# Altium PCB UKU207XX_POWER_BOARD.PCBDOC
Units mm, origin at the board's own origin, x right, y up, seen from the top; angles counter-clockwise.
Board outline 334.15 x 155.4 mm, 2 copper layers (Top Layer, Bottom Layer); 96 components, 597 nets, 270 pads, 39 vias.
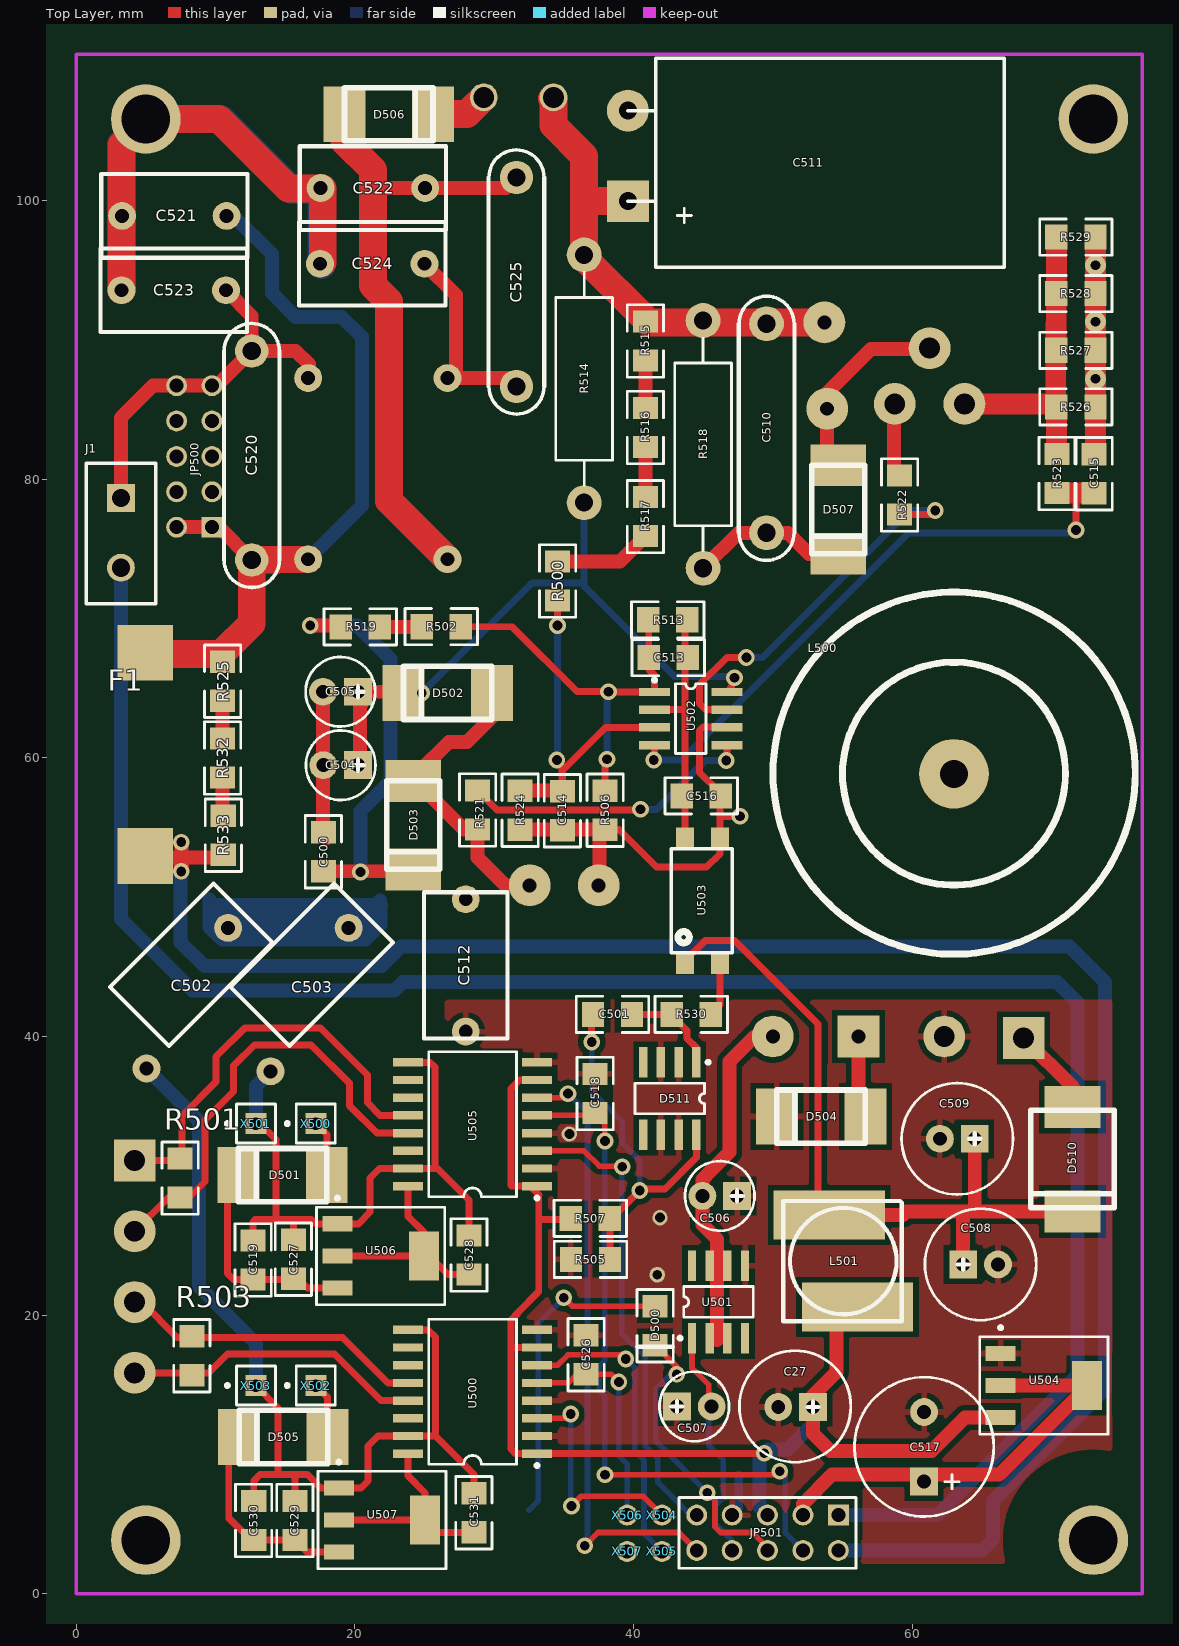
[diagram p0: Top Layer view]
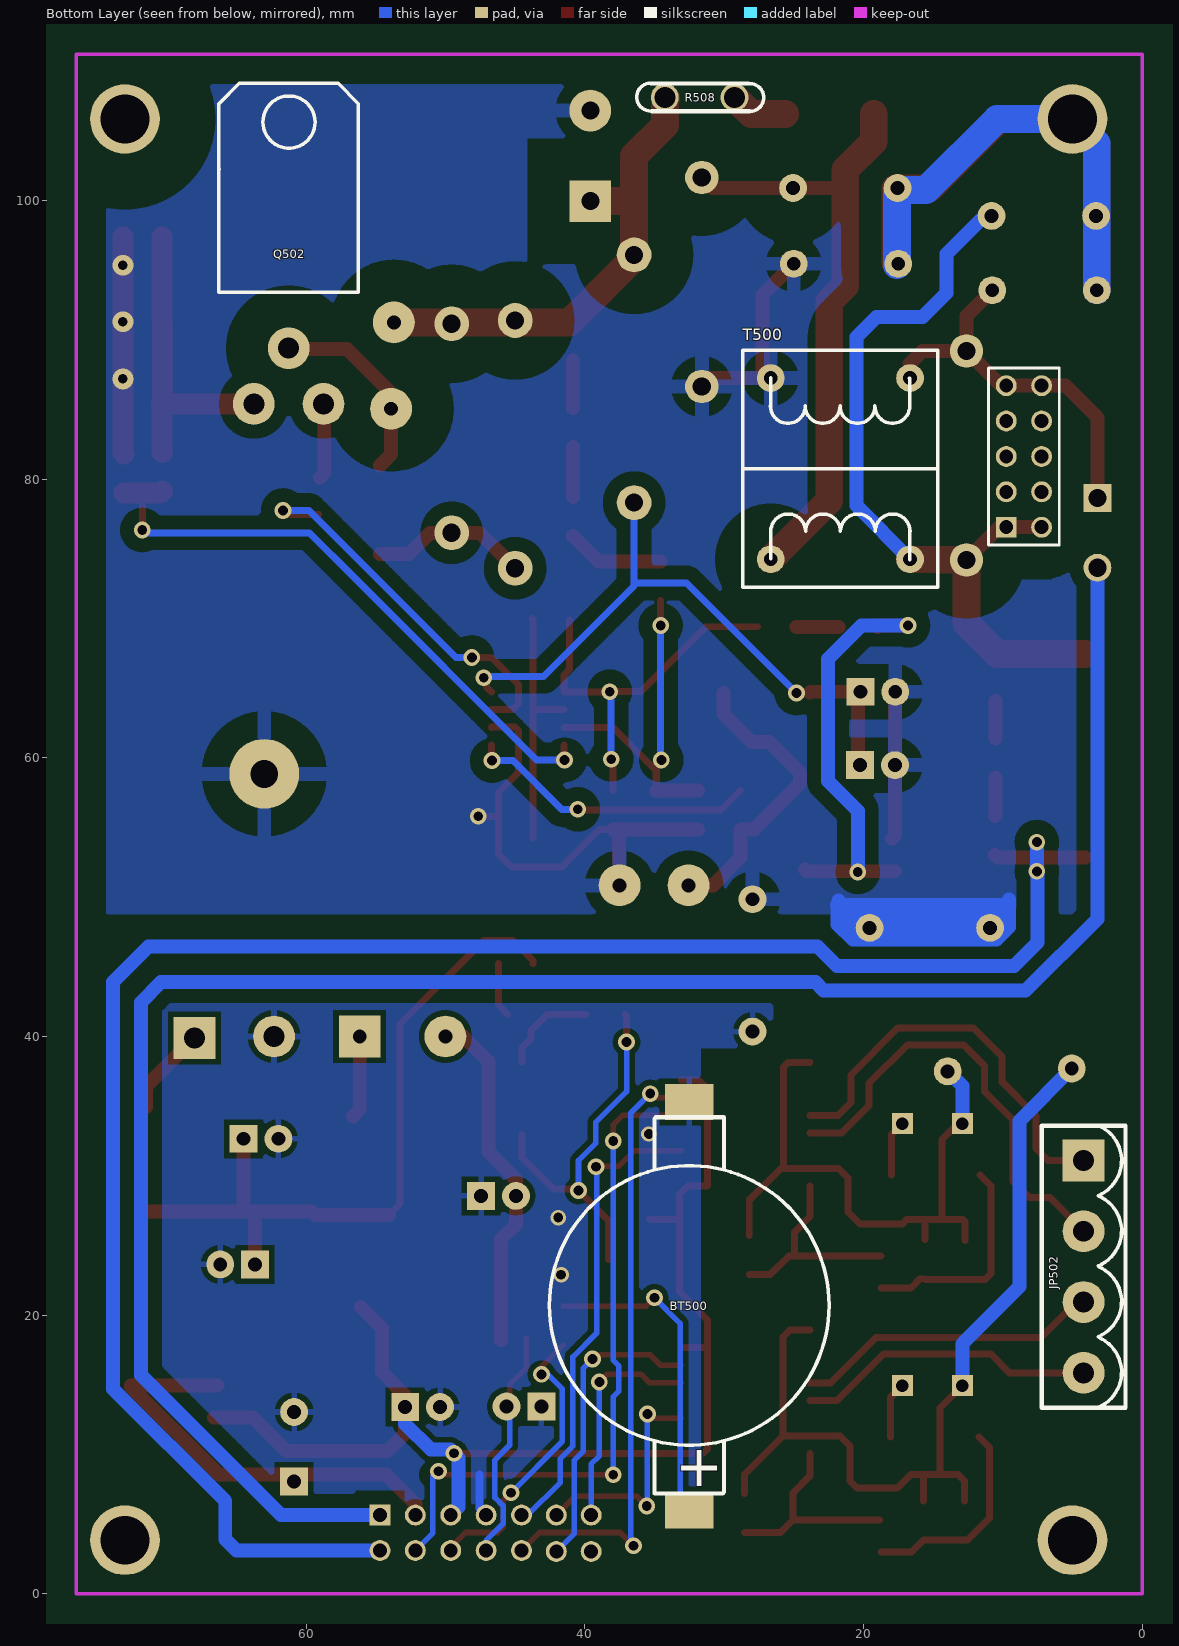
[diagram p1: Bottom Layer view, seen from below]

## Layer stack, top to bottom
Top Layer: signal copper 0.0356
Dielectric: dielectric 0.32, FR-4, Dk 4.8
Bottom Layer: signal copper 0.0356

## Board outline
-195.203,123.2 -195.203,-32.2 138.947,-32.2 138.947,123.2

## Design rules (kind name [scope] priority, off if disabled: settings)
Clearance Clearance_1 [InNet(NetJ1_2) or InNet(NetF1_1) vs InPoly] p1: gap=1
Clearance Keep_Out [OnLayer('Keep-Out Layer') vs not OnLayer('Top Overlay')] p2: gap=2
Clearance Clearance_2 [InNet('NetD506_1') or
InNet('NetD505_2') or
InNet('NetC510_2') or
InNet('NetD505_1') or
InNet('NetD507_1') or
InNet('NetC520_2') or
InNet('NetC522_2') or
InNet('GND_GND') vs InPoly] p3: gap=3
Clearance Clearance_4 [InNet(NetC500_1) or
InNet(NetBT500_2) vs HasPad('Free-0')] p4: gap=4
Clearance Holes [InPoly vs HasPad('Free-0') Or HasPad('Free-1') Or HasPad('Free-2') Or HasPad('Free-3')] p5: gap=2
Clearance Clearance_3 [InPoly and InNet(NetC500_1)] p6: gap=1
Clearance Poly [InPoly] p7: gap=0.4
Clearance [All] p8: gap=0.18
ComponentClearance [All] p1: gap=0.254 collisioncheckmode=0
HoleSize [All] p1: absolutevalues=TRUE maxlimit=5 minlimit=0 maxpercent=80.000 minpercent=20.000
PolygonConnect PolygonConnect_2 [InNet('NetC500_1')] p1: connectstyle=Relief reliefconductorwidth=1 reliefentries=4 polygonreliefangle="90 Angle"
PolygonConnect PolygonConnect_1 [InNet(NetC100_2)] p2: connectstyle=Direct reliefconductorwidth=0.254 reliefentries=4 polygonreliefangle="90 Angle"
PolygonConnect [All] p3: connectstyle=Relief reliefconductorwidth=0.4 reliefentries=4 polygonreliefangle="90 Angle"
RoomDefinition UKU207xx_power_board [InComponentClass('UKU207xx_power_board')] p1: confinementstyle=ConfineIn formatcopy=TRUE outline -224.903,-32.75 -174.103,-32.75 -174.103,-7.35 -224.903,-7.35
RoutingLayers [All] p1: top layer=Horizontal bottom layer=Vertical
RoutingVias [All] p1: holewidth=0.7 width=1.2 viastyle="Through Hole" minholewidth=0.6 minwidth=1.1 maxholewidth=0.7 maxwidth=1.2
SolderMaskExpansion [All] p1: expansion=0.102
TestPointUsage [All] p1: valid=0 allowmultiple=FALSE
Testpoint [All] p1: side=15 testpointundercomponent=TRUE minsize=1.016 maxsize=2.54 preferedsize=1.524 minholesize=0 maxholesize=1.016 preferedholesize=0.813 testpointgrid=0.025 style=1023 order=-539222988
Width [All] p1: maxlimit=5 minlimit=0.2 preferedwidth=0.254 toplayer_prefwidth=0.5 bottomlayer_prefwidth=1 minimp=50.000000 maximp=50.000000 favimp=50.000000
15 further rules are at their usual default settings.

## Components (designator, comment, footprint, x,y, rotation, side; value= is the part's Value field where it differs from the comment)
BT500 "CR2032" BAT_HOLD_SMD 32.5,6 r90 bottom
C27 "nichicon 330x16" el3 52.897,13.4 r180 top (schematic designator C?)
C500 "1.0" _1206#1 17.75,53.25 r270 top
C501 "0.1" _1206#1 38.5,41.6 r0 top
C502 "2n2" C8#1 5.6,42.5 r45 top (schematic designator C?)
C503 "2n2" C8#2 14.25,42.5 r45 top (schematic designator C?)
C504 "LXZ 22.0x50" el3 20.246,59.463 r180 top
C505 "LXZ 22.0x50" el3 20.227,64.731 r180 top
C506 "LXZ 22.0x50" el3 47.45,28.55 r180 top
C507 "LXZ 22.0x50" el3 43.1,13.45 r0 top
C508 "nichicon 330x16" el3 63.65,23.65 r0 top
C509 "nichicon 330x16" el3 64.5,32.65 r180 top
C510 "0.1x630" c15#1 49.55,83.65 r90 top
C511 "10.0x450" el_15_25_h 39.6,102.7 r270 top
C512 "1.0" C8#3 27.95,41.35 r90 top
C513 "390" _1206#1 42.5,67.2 r0 top
C514 "1n0" _1206#1 34.9,56.2 r270 top
C515 "1n0" _1206#1 73.05,80.4 r90 top
C516 "3n3" _1206#1 44.854,57.265 r180 top
C517 "1000x6,3 JAM" el5 60.85,13.05 r270 top
C518 "1n0" _1206#2 37.25,35.9 r270 top
C519 "1.0" _1206#2 12.7,23.95 r270 top
C520 "0.1x630" c15#2 12.6,81.7 r270 top
C521 "2n2" C8#4 3.3,98.9 r0 top
C522 "2n2" c8 17.55,100.9 r0 top
C523 "2n2" c8 10.75,93.55 r180 top
C524 "2n2" c8 25,95.45 r180 top
C525 "0.1х630" c15#2 31.6,94.15 r90 top
C526 "1n0" _1206#2 36.6,17.15 r270 top (schematic designator C1)
C527 "1.0" _1206#2 15.6,24 r270 top
C528 "1.0" _1206#2 28.2,24.3 r270 top
C529 "1.0" _1206#2 15.7,5.25 r270 top
C530 "1.0" _1206#2 12.75,5.25 r270 top
C531 "1.0" _1206#2 28.55,5.8 r270 top
D500 "LL4148" _1206d 41.55,19.25 r90 top
D501 "MBRS1100T3G" D_6_3 11.65,30.05 r0 top
D502 "MBRS1100T3G" D_6_3 23.5,64.65 r0 top
D503 "MBRS1100T3G" D_6_3 24.2,52 r90 top
D504 "MBRS1100T3G" D_6_3 50.3,34.25 r0 top
D505 "MBRS1100T3G" D_6_3 11.7,11.25 r0 top
D506 "STTH112" D_6_3 25.6,106.2 r180 top
D507 "STTH112" D_6_3 54.7,74.65 r90 top
D510 "30BQ100" 30BQ100 71.5,31.2 r90 top
D511 "TL431ACD" SO-G8 42.6,35.55 r180 top
F1 "Fuse 1" PIN-W2/E2.8 3.5,57.25 r90 top (schematic designator F?)
J1 "" BT5-2 3.2,78.65 r270 top
JP500 "IDC-10" HDR2X5 9.75,76.55 r90 top
JP501 "PLHD-10" HDR2X5 54.697,5.65 r180 top
JP502 "Header 4" 2EDG-5.08-4 4.2,31.1 r270 bottom
L500 "L220-K10" trans_ring1 63,58.85 r0 top
L501 "SDR0805-390KL" L10x10 60.15,28.95 r180 top
Q502 "STP4NK80Z" TO220_h 61.25,100.9 r0 bottom
R500 "M10" _1206#2 34.55,72.7 r90 top (schematic designator R?)
R501 "1K0" _1206#2 7.45,29.85 r90 top
R502 "6K2" _1206#1 26.2,69.4 r180 top
R503 "1K0" _1206#2 8.3,17.1 r90 top
R505 "2K2" _1206#1 36.9,24 r180 top
R506 "2K2" _1206#1 37.95,56.25 r90 top
R507 "2K2" _1206#1 36.9,26.95 r0 top
R508 "NTC 50R 10" JVR07N 34.25,107.4 r180 bottom
R513 "M10" _1206#1 42.45,69.9 r180 top
R514 "M24" AXIAL-0.7 36.45,87.2 r90 top
R515 "M10" _1206#1 40.847,89.923 r90 top
R516 "M10" _1206#1 40.847,83.72 r90 top
R517 "M10" _1206#1 40.847,77.32 r90 top
R518 "39K" AXIAL-0.7 45,82.5 r270 top
R519 "5K1" _1206#1 20.4,69.4 r0 top
R521 "51K" _1206#1 28.8,56.265 r90 top
R522 "30" _1206#1 59.1,78.85 r270 top
R523 "K56" _1206#1 70.402,80.4 r270 top
R524 "2K2" _1206#1 31.85,56.25 r90 top
R525 "33K" _1206#2 10.5,65.5 r90 top
R526 "6R8" _1206#1 71.758,85.192 r0 top
R527 "6R8" _1206#1 71.758,89.256 r0 top
R528 "6R8" _1206#1 71.758,93.32 r0 top
R529 "6R8" _1206#1 71.758,97.383 r0 top
R530 "K18" _1206#1 44.15,41.6 r0 top
R532 "33K" _1206#2 10.5,60 r90 top
R533 "33K" _1206#2 10.55,54.45 r90 top
T500 "TRANS1_1" 3030R4 21.65,80.75 r0 bottom
U500 "ADM2483" SO-G16/D10.4 28.45,14.5 r90 top
U501 "L79L05ACD" SO-G8 46.1,20.95 r0 top
U502 "L6565" so-g8 44.104,62.816 r270 top
U503 "FOD817ASD" FOD817ASD 43.7,45.25 r0 top
U504 "REG1117-3.3" DSO-G3 69.45,14.95 r270 top
U505 "ADM2483" SO-G16/D10.4 28.45,33.7 r90 top
U506 "REG1117-5.0" DSO-G3 21.85,24.25 r270 top
U507 "REG1117-5.0" DSO-G3 21.95,5.3 r270 top
X500 "Socket" PIN1#1 17.2,33.75 r90 top
X501 "Socket" PIN1#1 12.9,33.75 r90 top
X502 "Socket" PIN1#1 17.2,14.95 r90 top
X503 "Socket" PIN1#1 12.9,14.95 r90 top
X504 "Socket" PIN1#2 39.75,5.4 r90 top
X505 "Socket" PIN1#3 39.35,2.8 r90 top
X506 "Socket" PIN1#4 38.3,5.65 r90 top
X507 "Socket" PIN1#5 38.3,1.9 r90 top

## Footprints (in the part's own frame and the unit in brackets; to place one, negate y for a bottom-side part, rotate by r counter-clockwise, add the part's x,y. Pads: shape width x height; smd on the part's side, far side on the other; paste and mask are expansions set on the pad)
2EDG-5.08-4 [mm]
  rect 3x3 hole 1.5: 1(0,0)
  round 3 hole 1.5: 2(5.08,0) 3(10.16,0) 4(15.24,0)
  silkscreen extent -2.5,-3 17.75,3
30BQ100 [mm]
  rect 3x4 smd: 1(3.75,0) 2(-3.75,0)
  silkscreen extent -3.5,-3 3.5,3
3030R4 [mm]
  round 2 hole 1: 1(-5,-6.5) 2(5,-6.5) 3(-5,6.5) 4(5,6.5)
  silkscreen extent -7,-8.5 7,8.5
_1206#1 [mm]
  rect 1.6x1.8 smd: 1(-1.408,-0.007) 2(1.392,-0.007)
  silkscreen extent -2.61,-1.31 2.59,1.29
_1206#2 [mm]
  rect 1.6x1.8 smd: 1(-1.412,-0.007) 2(1.388,-0.007)
  silkscreen extent -2.61,-1.31 2.59,1.29
_1206d [mm]
  rect 1.6x1.8 smd: 1(1.397,-0.001) 2(-1.403,-0.001)
  silkscreen extent -2.6,-1.3 2.6,1.3
AXIAL-0.7 [mm]
  round 2.5 hole 1.3: 1(-8.887,-0.008) 2(8.893,-0.008)
  silkscreen extent -7.62,-2.04 7.62,2.02
BAT_HOLD_SMD [mm]
  rect 2.6x3.5 smd: 1(0,0) 2(29.3,0)
  silkscreen extent 1.2,-10.03 28.2,10.03
BT5-2 [mm]
  rect 2x2 hole 1.3: 1(0.006,0.008)
  round 2 hole 1.3: 2(5.006,0.008)
  silkscreen extent -2.49,-2.49 7.61,2.51
C8#1 [mm]
  round 2 hole 1: 1(-3.783,-3.005) 2(7.498,-0.008)
  silkscreen extent -1.5,-3.01 9,2.99
C8#2 [mm]
  round 2 hole 1: 1(-3.748,-3.323) 2(7.498,-0.008)
  silkscreen extent -1.5,-3.01 9,2.99
C8#3 [mm]
  round 2 hole 1: 1(-1.002,-0.008) 2(8.498,-0.008)
  silkscreen extent -1.5,-3.01 9,2.99
C8#4 [mm]
  round 2 hole 1: 1(-0.002,-0.008) 2(7.498,-0.008)
  silkscreen extent -1.5,-3.01 9,2.99
c8 [mm]
  round 2 hole 1: 1(-0.002,-0.008) 2(7.498,-0.008)
  silkscreen extent -1.5,-3.01 9,2.99
c15#1 [mm]
  round 2.5 hole 1.3: 1(-7.5,0) 2(7.5,0)
  silkscreen extent -9.48,-2 9.48,2
c15#2 [mm]
  round 2.4 hole 1.3: 1(-7.5,0) 2(7.5,0)
  silkscreen extent -9.48,-2 9.48,2
D_6_3 [mm]
  rect 3x4 smd: 1(6.341,0.006) 2(-0.009,0.006)
  silkscreen extent -0.01,-1.9 6.34,1.91
DSO-G3 [mm]
  rect 1.1x2.15 smd: 1(-2.3,-3.1) 2(0,-3.1) 3(2.3,-3.1)
  rect 3.5x2.15 smd: 4(0,3.1)
  silkscreen extent -4.27,-4.6 3.5,4.6
el3 [mm]
  rect 2x2 hole 1: 1(0.011,-0.008)
  round 2 hole 1: 2(2.511,-0.008)
  silkscreen extent -2.7,-4.05 5.3,3.95
el5 [mm]
  rect 2x2 hole 1: 1(5.001,0.007)
  round 2 hole 1: 2(0.001,0.007)
  silkscreen extent -2.5,-4.99 7.5,5.01
el_15_25_h [mm]
  rect 3x3 hole 1.3: 1(2.75,0)
  round 3 hole 1.3: 2(-3.75,0)
  silkscreen extent -7.5,0 7.5,27
FOD817ASD [mm]
  rect 1.3x1.5 smd: 1(0,0) 2(2.5,0) 3(2.5,9) 4(0,9)
  silkscreen extent -0.97,0.75 3.4,8.22
HDR2X5 [mm]
  rect 1.5x1.5 hole 1: 1(0,0)
  round 1.5 hole 1: 2(0,2.54) 3(2.54,0) 4(2.54,2.54) 5(5.08,0) 6(5.08,2.54) 7(7.62,0) 8(7.62,2.54) 9(10.16,0) 10(10.16,2.54)
JVR07N [mm]
  round 2 hole 1.5: 1(-0.004,0.002) 2(4.996,0.002)
  silkscreen extent -2.02,-1.01 7.09,1.02
L10x10 [mm]
  rect 8x3.5 smd: 1(4.075,8.372) 2(6.107,1.768)
  silkscreen extent 0.9,0.75 9.41,9.39
PIN1#1 [mm]
  rect 1.5x1.5 hole 0.9: 1(0,0)
  silkscreen extent -1.4,-1.4 1.4,2.17
PIN1#2 [mm]
  round 1.5 hole 1: 1(0.25,-2.29)
PIN1#3 [mm]
  round 1.5 hole 1: 1(0.24,-2.69)
PIN1#4 [mm]
  round 1.5 hole 1: 1(0,-1.24)
PIN1#5 [mm]
  round 1.5 hole 1: 1(1.14,-1.24)
PIN-W2/E2.8 [mm]
  rect 4x4 smd: 1(-4.3,-1.45) 2(10.3,-1.45)
SO-G8 [mm]
  rect 0.6x2.2 smd: 1(-1.905,-2.6) 2(-0.635,-2.6) 3(0.635,-2.6) 4(1.905,-2.6) 5(1.905,2.6) 6(0.635,2.6) 7(-0.635,2.6) 8(-1.905,2.6)
  silkscreen extent -2.88,-2.72 2.5,1.1
so-g8 [mm]
  rect 0.6x2.2 smd: 1(-1.905,-2.6) 2(-0.635,-2.6) 3(0.635,-2.6) 4(1.905,-2.6) 5(1.905,2.6) 6(0.635,2.6) 7(-0.635,2.6) 8(-1.905,2.6)
  silkscreen extent -2.88,-2.72 2.5,1.1
SO-G16/D10.4 [mm]
  rect 0.6x2.15 smd: 1(-4.445,-4.625) 2(-3.175,-4.625) 3(-1.905,-4.625) 4(-0.635,-4.625) 5(0.635,-4.625) 6(1.905,-4.625) 7(3.175,-4.625) 8(4.445,-4.625) 9(4.445,4.625) 10(3.175,4.625) 11(1.905,4.625) 12(0.635,4.625) 13(-0.635,4.625) 14(-1.905,4.625) 15(-3.175,4.625) 16(-4.445,4.625)
  silkscreen extent -5.42,-4.75 5.2,3.15
TO220_h [mm]
  round 3 hole 1.5: 1(-2.5,15.5) 2(0,11.5) 3(2.5,15.5)
  silkscreen extent -5,-7.5 5,7.5
trans_ring1 [mm]
  round 3 hole 1: 1(-9.3,32.4) 2(-9.1,26.2) 3(-25.5,-8) 4(-30.45,-8) 5(-13,-18.85)
  rect 3x3 hole 1: 6(-6.85,-18.85)
  round 3 hole 1.5 unplated: 7(-0.7,-18.85)
  rect 3x3 hole 1.5: 8(5,-18.95)
  silkscreen extent -12.99,-12.95 13.01,13.05

## Part data
BT500: library part Battery, "Multicell Battery"
C27 C504 C505 C506 C507 C508 C509 C511 C517: library part "Cap Pol1", "Polarized Capacitor (Radial)"
C500 C501 C502 C503 C510 C512 C513 C514 C515 C516 C518 C519 C520 C521 C522 C523 C524 C525 C526 C527 C528 C529 C530 C531: library part "Cap Semi", "Capacitor (Semiconductor SIM Model)"
D500: library part Diode, "Default Diode"
D501 D502 D503 D504 D505 D510: library part 10BQ015, "Schottky Rectifier"
D506 D507: library part 10BQ015, "Schottky Diode"
D511: "Programmable Precision Reference"
F1: "Fuse"
J1: library part JMP, "Switch"
JP500 JP501: library part "Header 10", "Header, 10-Pin"
JP502: library part "Header 3", "Header, 3-Pin"
L500: library part L1_dc_2, "Дроссель"
L501: library part "Inductor Konstr 2", "Magnetic-Core Inductor"
Q502: library part NMOS-2, "N-Channel Power MOSFET"
R500 R501 R502 R503 R505 R506 R507 R513 R514 R515 R516 R517 R518 R519 R521 R522 R523 R524 R525 R526 R527 R528 R529 R530 R532 R533: library part Res2, "Resistor"
R508: library part "Res Varistor", "Varistor (Voltage-Sensitive Resistor)"
U501: "Negative Voltage Regulator"
U503: library part F00817ASD
U504: "800mA and 1A Low Dropout Positive Regulator 2.85V, 3.3V, 5V, and Adjustable"
U506 U507: library part REG1117-3.3, "800mA and 1A Low Dropout Positive Regulator 2.85V, 3.3V, 5V, and Adjustable"

## Free pads (board coordinates)
  round 5 hole 3.5: 0(5,105.85) 0(5,3.85) 0(73,105.85) 0(73,3.85)
  round 5 hole 2: 1(63,58.85)

## Via types
v1: diameter 1.2, hole 0.7, Top Layer to Bottom Layer, 33 vias
v2: diameter 1.1, hole 0.7, Top Layer to Bottom Layer, 3 vias
v3: diameter 1.5, hole 0.7, Top Layer to Bottom Layer, 3 vias

## Nets (pads, with @x,y where several pads share a name; then routed paths per layer and width w, separated by ;. In a path a pad name is that pad's centre, name@x,y a point inside that pad or via, vN(x,y) a via of type N, cw(c..) or ccw(c..) an arc to the next point about the centre after c; other vN are vias at no path point)
+1.8V: 
+3.3V: 
+3V3: 
+5V: 
+5V_IZ: 
+IAKB1: 
+IAKB2: 
-5V: 
-5V_IZ: 
-IAKB1: 
-IAKB2: 
-UOUT: 
BAT: 
CANH: 
CANL: 
DB0: 
DB1: 
DB2: 
DB3: 
DB4: 
DB5: 
DB6: 
DB7: 
DT1: 
DT2: 
DT3: 
DT4: 
DT5: 
GND: 
GND_GND: C521.1 C522.1 C523.2 C524.2 pad.0@5,105.85 | length 66.4
  Top Layer w2: C523.2 3.252,104.002 pad.0@5.1,105.85 ; pad.0@5,105.85 10.25,105.85 15.25,100.85 17.7,100.85 C524.2@17.7,95.55
  Bottom Layer w2: C523.2 3.252,104.102 pad.0@5,105.85 ; pad.0@4.9,105.75 pad.0@5,105.85 ; C524.2@17.6,95.35 17.6,100.75 15.5,100.75 10.4,105.85 9.5,105.85 pad.0@5,105.85
NetA1_1: 
NetA1_2: 
NetBT1_1: 
NetBT1_2: 
NetBT2_1: 
NetBT2_2: 
NetBT500_1: BT500.1 D500.1 | length 23.1
  Top Layer w0.4: v1(35,21.25) 35.603,20.647 D500.1
  Bottom Layer w0.4: BT500.1 33.15,6.65 33.15,19.4 v1(35,21.25)
NetBT500_2: BT500.2 C27.2 C506.1 C507.1 C508.2 C509.2 C512.1 C517.2 C518.1 C526.1 D504.2 D511.2 D511.3 D511.6 D511.7 JP501.7 L500.7 R505.2 U500.2 U500.4 U500.8 U501.5 U504.1 U505.2 U505.4 U505.8 | length 3.1
  Bottom Layer w0.6: JP501.7 47.55,6.123 47.55,8.55
  other v2: 41.697,22.9 41.897,27 35.397,33
NetC2_1: 
NetC2_2: 
NetC11_1: 
NetC11_2: 
NetC12_2: 
NetC14_2: 
NetC21_1: 
NetC22_1: 
NetC23_1: 
NetC27_1: C27.1 JP501.5 L501.1 R507.1 U500.1 U500.7 U504.3 U505.1 U505.7 | length 89.1
  Top Layer w0.5: 31.3,17.75 31.35,17.75 31.425,17.675 U500.7 ; 31.7,20.2 33.2,21.7 33.2,28.6 ; 31.725,20.175 31.2,19.65 31.2,10.4 31.545,10.055 49.305,10.055 v1@49.35,10.1 ; U505.7 31.825,36.875 31.2,36.25 31.2,29.3 31.245,29.255 32.6,29.255 32.837,29.018 33.228,28.628 ; 33.2,26.85 35.3,26.85 R507.1@35.35,26.9
  Top Layer w1: L501.1 54.561,19.065 54.561,15.911 52.885,14.235 52.885,11.511 54.147,10.25 61.4,10.25 63.8,12.65 U504.3@66.6,12.65
  Bottom Layer w1: v1@49.35,10.1 49.364,10.1 v1(49.382,10.082) ; JP501.5 49.05,6.217 49.05,9.75 49.375,10.075 v1(49.382,10.082) ; C27.1 52.885,12.185 51.05,10.35 v1@49.65,10.35 ; v1(49.382,10.082) v1@49.65,10.35 ; v1(49.382,10.082) v1@49.65,10.35
NetC33_1: 
NetC35_2: 
NetC36_2: 
NetC37_2: 
NetC45_1: 
NetC45_2: 
NetC46_1: 
NetC46_2: 
NetC47_2: 
NetC48_1: 
NetC48_2: 
NetC49_1: 
NetC50_2: 
NetC51_2: 
NetC52_2: 
NetC53_2: 
NetC61_1: 
NetC61_2: 
NetC62_2: 
NetC63_2: 
NetC66_1: 
NetC100_1: 
NetC100_2: 
NetC101_1: 
NetC102_1: 
NetC103_1: 
NetC103_2: 
NetC104_2: 
NetC105_2: 
NetC107_1: 
NetC107_2: 
NetC110_1: 
NetC111_1: 
NetC111_2: 
NetC114_1: 
NetC117_1: 
NetC300_2: 
NetC302_1: 
NetC302_2: 
NetC500_1: C500.1 C502.2 C503.2 C504.2 C505.2 C511.2 C512.2 C514.2 C515.2 C516.1 C524.1 C525.1 L500.3 pad.1 R506.1 R524.1 R526.2 R527.2 R528.2 R529.2 T500.2 U502.6 U503.3 | length 130.9
  Top Layer w0.5: R506.1 38.958,54.842 41.65,52.15 43.75,52.15 ; 42,52.15 45.25,52.15 46.2,53.1 46.2,57.5 44.75,58.95 44.75,61.95 45,62.2 46.685,62.2 U502.6 ; 46.2,55.8 v1(47.65,55.8)
  Top Layer w1: C505.2@17.727,64.731 17.727,54.408 C500.1@17.942,54.193 ; C524.1 27.252,93.208 27.252,87.852 T500.2 31,87.25 C525.1 ; R524.1 R506.1 ; L500.3@37.55,50.2 37.55,54.55 R506.1@37.65,54.65
  Top Layer w1.5: C515.2 73.15,81.885 R529.2
  Bottom Layer w1: 9.55,48.05 9.804,47.796 20.504,47.796 20.6,47.7 ; 9.55,49.85 9.55,47.85 10.45,46.95 20.75,46.95 21.85,48.05 21.85,49.403 21.897,49.45 ; 9.7,49.45 21.15,49.45 ; 9.95,48.75 10.15,48.55 21.797,48.55 ; C503.2 21.196,47.796 21.797,48.397 21.797,49.75
  other v3: 73.15,87.2 73.15,91.3 73.15,95.35
NetC500_2: C500.2 D503.2 R519.1 | length 31.7
  Top Layer w1: v1(16.8,69.5) 18.885,69.5 R519.1 ; C500.2 24.061,51.858 D503.2 ; v1(20.4,51.808) v1@20.45,51.858
  Bottom Layer w1: v1(16.8,69.5) 20.15,69.5 22.55,67.1 22.55,58.35 20.4,56.2 v1(20.4,51.808)
NetC501_1: C501.1 D511.8 R505.1 R507.2 | length 26.6
  Top Layer w0.5: v1(37,39.6) 37,41.5 C501.1 ; R505.1 38.308,26.808 38.35,26.85 38.368,26.868 v1(40.45,28.95) 40.55,29.05 42.25,29.05 44.505,31.305 D511.8
  Bottom Layer w0.4: v1(37,39.6) 37,36.05 39.2,33.85 39.2,32.35 40.45,31.1 v1(40.45,28.95)
NetC501_2: C501.2 D511.1 R530.1 | length 7
  Top Layer w0.5: C501.2 42.693,41.593 43.85,40.435 43.85,39.85 44.505,39.195 D511.1
NetC502_1: C502.1 C529.1 C530.1 C531.1 U500.9 U500.15 U507.1 X503.1 | length 67.6
  Top Layer w0.5: C530.1 12.743,8.093 13.2,8.55 16.6,8.55 17.55,7.6 20.45,7.6 20.95,8.1 20.95,10.6 21.675,11.325 25.775,11.325 ; X503.1 14.5,13.35 14.5,8.6 14.45,8.55 ; C529.1 15.693,8.493 15.75,8.55 ; U500.9 25.255,18.945 25.775,18.425 25.775,11.325 ; C531.1 28.543,8.557 25.775,11.325
  Bottom Layer w1: C502.1 8.8,33.95 8.8,22.05 12.9,17.95 X503.1
NetC503_1: 
NetC503_1: C503.1 C519.1 C527.1 C528.1 U505.9 U505.15 U506.1 X501.1 | length 46.2
  Top Layer w0.5: C519.1 12.693,26.693 12.85,26.85 16.9,26.85 17.2,26.55 U506.1 20.25,26.55 21.1,27.4 21.1,29.85 21.775,30.525 U505.15 25.925,30.525 28.193,28.257 C528.1 ; X501.1 13.2,33.75 14.35,32.6 14.35,26.85 ; 15.55,26.85 15.593,26.807 C527.1 ; U505.9 25.405,38.145 25.75,37.8 25.75,30.525
  Bottom Layer w1: X501.1 12.9,36.45 C503.1
NetC504_1: C504.1 C505.1 D502.2 R514.1 U502.8 | length 44.6
  Top Layer w0.5: D502.2@24.55,64.65 v1(24.8,64.65) ; U502.8 47.05,65.067 v1@47.05,65.85
  Top Layer w1: C505.1@20.227,64.731 C505.1@20.385,64.873 ; C504.1@20.385,59.621 20.385,64.739 23.811,64.739 D502.2@23.85,64.7 ; C505.1@20.385,63.85 C505.1@20.435,63.8
  Bottom Layer w0.5: v1(24.8,64.65) 32.7,72.55 36.458,72.55 ; R514.1 36.458,72.342 42.95,65.85 v1@47.05,65.85
  other v1: 47.25,65.75
NetC505_1: 
NetC505_2: 
NetC506_2: C506.2 L500.5 U501.2 U501.3 U501.6 U501.7 | length 25.1
  Top Layer w1: 46,18.2 46,25.45 44.939,26.511 C506.2 44.939,29.739 45.65,30.45 46.9,31.7 46.9,38.2 48.7,40 L500.5
NetC507_2: C507.2 JP501.8 U501.1 | length 16.9
  Top Layer w0.4: U501.1 44.195,16.205 45.389,15.011 C507.2@45.389,13.558
  Bottom Layer w0.4: C507.2@45.389,13.558 45.389,10.661 46.45,9.6 46.45,6.9 45.85,6.3 45.85,5.05 47.077,3.823 JP501.8
NetC508_1: C508.1 C509.1 D510.2 L501.2 U503.1 | length 53.5
  Top Layer w0.5: U503.1 43.7,45.45 45.15,46.9 47.25,46.9 53.25,40.9 53.25,27.976 L501.2
  Top Layer w1: L501.2 59.332,27.182 59.6,27.45 D510.2 ; C508.1 63.661,27.411 63.7,27.45 ; 64.489,27.461 C509.1
NetC510_1: C510.1 D507.2 R518.2 | length 11.4
  Top Layer w1: R518.2 47.535,76.15 51.1,76.15 52.609,74.641 D507.2
NetC510_2: C510.2 C511.1 L500.1 R508.1 R514.2 R515.2 R518.1 | length 43.5
  Top Layer w1: R518.1 45.13,91.25 L500.1
  Top Layer w2: R508.1@34.154,107.302 34.25,107.206 34.25,105.4 36.458,103.192 36.458,95.892 41.1,91.25 L500.1 ; 36.458,99.9 36.508,99.95 C511.1
NetC511_1: 
NetC511_2: 
NetC513_1: C513.1 R502.1 R506.2 R513.2 U502.1 | length 28.4
  Top Layer w0.5: R502.1 31.293,69.407 35.95,64.75 v1(38.2,64.75) 38.229,64.721 U502.1 41.504,65.946 41.092,66.358 41.092,69.873 R513.2 ; R506.2 37.957,59.757 v1(38.1,59.9)
  Bottom Layer w0.5: v1(38.1,59.9) 38.1,64.65 v1(38.2,64.75)
NetC513_2: C513.2 C516.2 R513.1 U502.2 U503.4 | length 18
  Top Layer w0.5: U502.2 43.699,63.451 43.7,63.45 ; U503.4 43.7,64.75 43.7,69.9 R513.1@43.8,70
NetC514_1: C514.1 R500.1 R524.2 U502.3 | length 26.3
  Top Layer w0.5: v1(34.5,59.85) 34.5,59.65 34.858,59.292 34.858,57.642 C514.1@34.75,57.642 ; v1(34.55,69.5) 34.557,69.507 R500.1 ; C514.1 34.892,59.092 37.981,62.181 U502.3
  Top Layer w1: R524.2 34.858,57.642 C514.1
  Bottom Layer w0.5: v1(34.5,59.85) 34.55,59.9 v1(34.55,69.5)
NetC515_1: C515.1 R523.2 U502.4 | length 43.7
  Top Layer w0.5: v1(41.45,59.85) 41.504,59.904 U502.4 ; v1(71.75,76.35) 71.75,78.992
  Top Layer w1.5: R523.2@70.303,79.15 70.461,78.992 C515.1
  Bottom Layer w0.5: v1(41.45,59.85) 43.45,59.85 56.65,73.05 59.75,76.15 71.55,76.15 v1(71.75,76.35)
NetC516_1: 
NetC516_2: 
NetC517_1: C517.1 JP501.3 U504.2 U504.4 | length 30.7
  Top Layer w1: JP501.3 52.157,6.457 54.25,8.55 66.25,8.55 72.55,14.85 U504.4 ; 65.65,8.55 65.651,8.549 ; U504.2 72.25,14.95 U504.4@72.3,15
NetC518_2: C518.2 JP501.4 U505.5 | length 49.9
  Top Layer w0.4: U505.5 37.285,34.335 37.95,33.67 v1(37.95,32.5) ; v1(37.95,8.55) v1@50.9,8.55
  Bottom Layer w0.4: v1(37.95,8.55) 37.95,14.15 37.55,14.55 37.55,16.35 37.95,16.75 v1(37.95,32.5) ; v1(50.5,8.8) 50.9,8.4 50.9,4.367 JP501.4
NetC519_2: C519.2 C527.2 D501.2 U506.3 | length 15.8
  Top Layer w0.5: D501.2 10.85,29.265 10.85,23 11.288,22.562 C519.2 15.543,22.562 C527.2 15.938,22.612 16.6,21.95 U506.3
NetC520_1: C520.1 C523.1 J1.1 JP500.9 JP500.10 T500.1 | length 28.7
  Top Layer w1: J1.1 3.208,84.408 5.51,86.71 JP500.10@7.05,86.71 ; 5.56,86.71 8.95,86.71 10.11,86.71 C520.1 ; C523.1 12.6,91.71 12.6,90.7 ; 12.6,91.16 C520.1 ; 16.7,88.25 15.75,89.2 C520.1
NetC520_2: C520.2 C521.2 F1.2 JP500.1 JP500.2 R525.2 T500.3 | length 58.3
  Top Layer w0.5: R525.2@10.457,66.888 R525.2@10.719,67.15
  Top Layer w1: JP500.2@7.1,76.55 8.95,76.55 10.25,76.55 C520.2
  Top Layer w2: F1.2@4.1,67.45 10.4,67.45 12.6,69.65 C520.2 T500.3
  Bottom Layer w1: C521.2 11.308,98.892 14.05,96.15 14.05,94.2 ; 14.05,95.14 14.05,93.35 15.75,91.65 19.05,91.65 20.5,90.2 20.5,78.1 T500.3
NetC522_2: C522.2 C525.2 D506.1 T500.4 | length 45.6
  Top Layer w1: 21.358,100.892 C522.2 27.298,100.892 30.842,100.892 C525.2
  Top Layer w2: D506.1 19.259,104.241 21.3,102.2 21.3,101 21.3,93.9 22.45,92.75 22.45,78.45 T500.4 ; 21.3,100.95 21.358,100.892
NetC526_2: C526.2 U500.5 X506.1 | length 16.2
  Top Layer w0.4: U500.5 35.335,15.135 35.962,15.762 38.388,15.762 v1(38.95,15.2)
  Bottom Layer w0.4: v1(38.95,15.2) 38.95,9.9 39.54,9.31 X506.1
NetC528_2: C528.2 U505.16 U506.2 U506.4 | length 15.5
  Top Layer w0.5: U506.2 25.35,24.25 26.688,22.912 C528.2 ; U505.16 23.825,27.075 24.95,25.95 U506.4
NetC529_2: C529.2 C530.2 D505.2 U507.3 | length 14.9
  Top Layer w0.5: D505.2 10.95,10.515 10.95,5.45 12.538,3.862 C529.2 16.556,3 U507.3@18.75,3
NetC531_2: C531.2 U500.16 U507.2 U507.4 | length 15.3
  Top Layer w0.5: U507.2 U507.4 ; U500.16 23.825,8.475 25.05,7.25 U507.4 ; C531.2 25.938,4.412 U507.4
NetC600_1: 
NetC600_2: 
NetD1_2: 
NetD3_1: 
NetD3_2: 
NetD5_1: 
NetD20_2: 
NetD101_1: 
NetD101_2: 
NetD102_1: 
NetD103_1: 
NetD105_1: 
NetD105_2: 
NetD106_1: 
NetD116_2: 
NetD500_1: 
NetD500_2: D500.2 JP501.6 | length 20.9
  Top Layer w0.4: D500.2 43.1,16.298 v1(43.1,15.75) ; v1(45.3,7.25) 45.85,6.7 45.85,4.8 46.25,4.4 48.55,4.4 49.617,3.333 JP501.6
  Bottom Layer w0.4: v1(43.1,15.75) 42.65,15.75 41.6,14.7 41.6,10.95 v1(45.3,7.25)
NetD501_1: D501.1 X500.1 | length 4
  Top Layer w0.5: X500.1 17.991,32.959 D501.1
NetD502_1: D502.1 D503.1 L500.4 R521.1 | length 21.7
  Top Layer w1: D502.1@30.05,64.65 30.05,63.15 28.05,61.15 26.75,61.15 24.55,58.95 24.55,58.4 24.55,58.15 27.843,54.857 R521.1 28.807,52.843 30.8,50.85 L500.4
NetD503_1: 
NetD504_1: D504.1 L500.6 | length 5.9
  Top Layer w1: L500.6 56.15,34.746 D504.1
NetD505_1: D505.1 X502.1 | length 4
  Top Layer w0.5: X502.1 18.041,14.109 D505.1
NetD506_2: D506.2 R508.2 | length 4.8
  Top Layer w2: D506.2 28.046,106.194 29.154,107.302 R508.2@28.596,106.744
NetD507_1: D507.1 L500.2 Q502.2 | length 14.1
  Top Layer w1: D507.1 53.9,81.785 53.9,86.2 57.05,89.35 Q502.2@61.197,89.35
NetD510_1: D510.1 L500.8 | length 6.4
  Top Layer w1: L500.8 71.5,36.4 D510.1
NetDS1_1: 
NetDS1_2: 
NetF1_1: F1.1 JP501.2 R533.1 | length 139.8
  Top Layer w1: F1.1@4.1,52.85 10.369,52.85 R533.1 ; 7.5,52.85 7.5,51.9 v1(7.55,51.85) ; v1(7.55,53.95) 7.55,52.4 v1@7.6,52.35
  Bottom Layer w1: v1@7.5,51.85 7.5,46.75 9.2,45.05 21.9,45.05 23.3,46.45 71.3,46.45 73.85,43.9 73.85,14.7 65.8,6.65 65.8,3.9 65.01,3.11 JP501.2 ; v1(7.55,51.85) v1(7.55,53.95)
NetFU100_1: 
NetFU500_1: 
NetJ1_2: 
NetJ1_2: J1.2 JP501.1 | length 144.9
  Bottom Layer w1: J1.2 3.208,48.442 8.35,43.3 22.85,43.3 23.45,43.9 70.4,43.9 71.85,42.45 71.85,15.7 61.8,5.65 JP501.1
NetJ1_3: 
NetJ1_4: 
NetJ1_5: 
NetJ1_7: 
NetJ301_1: 
NetJ301_2: 
NetJ301_3: 
NetJ301_6: 
NetJ301_10: 
NetJ301_11: 
NetJ600_1: 
NetJP1_2: 
NetJP2_2: 
NetJP3_1: 
NetJP3_2: 
NetJP3_3: 
NetJP3_3: 
NetJP3_3: 
NetJP3_4: 
NetJP3_5: 
NetJP3_6: 
NetJP3_7: 
NetJP5_5: 
NetJP5_6: 
NetJP5_7: 
NetJP5_9: 
NetJP5_10: 
NetJP5_11: 
NetJP5_12: 
NetJP7_2: 
NetJP7_3: 
NetJP7_4: 
NetJP7_5: 
NetJP7_6: 
NetJP7_7: 
NetJP8_1: 
NetJP8_2: 
NetJP8_3: 
NetJP8_4: 
NetJP9_1: 
NetJP11_1: 
NetJP12_3: 
NetJP12_4: 
NetJP501_9: JP501.9 U505.3 | length 34
  Top Layer w0.4: U505.3 36.455,31.795 37.55,30.7 v1@39.05,30.7
  Bottom Layer w0.4: v1@39.05,30.7 39.15,30.6 39.15,18.7 40.85,17 40.85,10.6 41.75,9.7 41.75,8 44.1,5.65 JP501.9
  other v1: 39.2,30.65
NetJP501_10: JP501.10 U505.6 | length 44.4
  Top Layer w0.4: U505.6 35.005,35.605 v1(35.3,35.9) ; v1(36.5,3.45) 37.45,4.4 43.247,4.4 JP501.10
  Bottom Layer w0.4: v1(35.3,35.9) 36.7,34.5 36.7,3.65 v1(36.5,3.45)
NetJP501_10: 
NetJP502_1: JP502.1 R501.2 U505.12 | length 29.8
  Top Layer w0.5: JP502.1 6.75,31.1 7.6,31.95 7.6,34.3 10.05,36.75 10.05,38.55 12.1,40.6 17.55,40.6 20.9,37.25 20.9,35.25 21.815,34.335 U505.12
NetJP502_2: JP502.2 R501.1 U505.13 | length 32.4
  Top Layer w0.5: JP502.2 6.618,28.438 8.088,28.438 9.25,29.6 9.25,34 11.3,36.05 11.3,37.9 12.8,39.4 16.85,39.4 19.6,36.65 19.6,35.05 21.585,33.065 U505.13
NetJP502_3: JP502.3 R503.2 U500.12 | length 22
  Top Layer w0.5: JP502.3 4.71,20.94 7.25,18.4 19.1,18.4 22.365,15.135 U500.12
NetJP502_4: JP502.4 R503.1 U500.13 | length 21.6
  Top Layer w0.5: JP502.4 9.51,15.86 10.85,17.2 18.55,17.2 21.885,13.865 U500.13
NetL500_10: 
NetQ1_1: 
NetQ1_2: 
NetQ2_1: 
NetQ2_3: 
NetQ4_1: 
NetQ5_2: 
NetQ6_1: 
NetQ7_2: 
NetQ7_4: 
NetQ8_2: 
NetQ8_4: 
NetQ9_2: 
NetQ9_4: 
NetQ10_1: 
NetQ10_3: 
NetQ10_3: 
NetQ11_1: 
NetQ11_1: 
NetQ11_3: 
NetQ501_1: 
NetQ502_1: Q502.1 R522.1 | length 5.4
  Top Layer w1: Q502.1@58.697,85.35 58.697,80.403 R522.1@59,80.1
NetQ502_3: Q502.3 R523.1 R526.1 R527.1 R528.1 R529.1 | length 22.2
  Top Layer w1.5: Q502.3@63.85,85.4 R526.1@70.397,85.4 ; R523.1@70.303,81.9 70.353,81.95 R526.1@70.353,85.5 ; R526.1@70.303,85.3 R529.1
NetQ600_1: 
NetQ600_3: 
NetR3_1: 
NetR3_2: 
NetR3_2: 
NetR3_2: 
NetR3_2: 
NetR3_2: 
NetR3_2: 
NetR3_2: 
NetR4_1: 
NetR4_2: 
NetR5_1: 
NetR5_2: 
NetR6_1: 
NetR6_2: 
NetR7_1: 
NetR7_2: 
NetR7_2: 
NetR8_1: 
NetR8_1: 
NetR8_2: 
NetR8_2: 
NetR14_2: 
NetR20_1: 
NetR22_2: 
NetR22_2: 
NetR22_2: 
NetR22_2: 
NetR22_2: 
NetR22_2: 
NetR22_2: 
NetR22_2: 
NetR22_2: 
NetR25_1: 
NetR30_2: 
NetR38_1: 
NetR42_1: 
NetR42_2: 
NetR43_1: 
NetR43_2: 
NetR43_2: 
NetR44_1: 
NetR44_2: 
NetR44_2: 
NetR45_2: 
NetR49_1: 
NetR49_2: 
NetR51_1: 
NetR51_2: 
NetR52_1: 
NetR53_1: 
NetR57_1: 
NetR60_1: 
NetR69_2: 
NetR83_1: 
NetR86_1: 
NetR90_2: 
NetR91_1: 
NetR95_1: 
NetR96_2: 
NetR104_1: 
NetR104_2: 
NetR105_2: 
NetR110_1: 
NetR110_2: 
NetR112_1: 
NetR113_1: 
NetR114_1: 
NetR115_1: 
NetR116_1: 
NetR117_2: 
NetR120_1: 
NetR305_2: 
NetR306_2: 
NetR500_2: R500.2 R517.1 | length 7.1
  Top Layer w1: R500.2 39.03,74.088 R517.1
NetR502_2: R502.2 R519.2 | length 3
  Top Layer w1: R519.2 24.793,69.393 R502.2
NetR504_1: 
NetR505_2: 
NetR505_2: 
NetR515_1: R515.1 R516.2 | length 3.4
  Top Layer w1: R516.2 R515.1
NetR516_1: R516.1 R517.2 | length 3.6
  Top Layer w1: R517.2 R516.1
NetR521_2: R521.2 U502.5 | length 22.4
  Top Layer w0.5: R521.2 30.214,56.25 40.45,56.25 v1(40.5,56.3) ; v1(46.65,59.8) 46.704,59.854 U502.5
  Bottom Layer w0.5: v1(40.5,56.3) 41.65,56.3 45.15,59.8 v1(46.65,59.8) 45.3,59.8
NetR522_2: R522.2 U502.7 | length 28.2
  Top Layer w0.5: U502.7 45.199,63.451 44.75,63.9 44.75,65.25 46.7,67.2 v1(48.1,67.2) ; R522.2 61.358,77.458 v1(61.65,77.75)
  Bottom Layer w0.5: v1(48.1,67.2) 49.25,67.2 59.8,77.75 v1(61.65,77.75)
NetR525_1: R525.1 R532.2 | length 5.4
  Top Layer w0.5: R525.1@10.457,64.088 10.457,61.438 R532.2
  Top Layer w1: R532.2 R525.1
NetR530_2: R530.2 U503.2 | length 3.9
  Top Layer w0.5: R530.2 46.2,42.25 U503.2
NetR532_1: R532.1 R533.2 | length 5.5
  Top Layer w0.5: R532.1 10.507,55.888 R533.2
  Top Layer w1: R532.1 10.507,55.888 R533.2
NetR600_1: 
NetR600_2: 
NetR603_1: 
NetR603_2: 
NetR605_2: 
NetS2_1: 
NetU1_1: 
NetU1_4: 
NetU1_5: 
NetU3_13: 
NetU3_14: 
NetU3_16: 
NetU5_1: 
NetU8_3: 
NetU8_7: 
NetU8_8: 
NetU11_5: 
NetU14_3: 
NetU14_4: 
NetU14_5: 
NetU14_6: 
NetU14_12: 
NetU14_13: 
NetU14_14: 
NetU15_3: 
NetU15_3: 
NetU15_3: 
NetU15_3: 
NetU15_4: 
NetU15_5: 
NetU15_5: 
NetU15_5: 
NetU15_5: 
NetU15_5: 
NetU15_5: 
NetU15_7: 
NetU15_7: 
NetU15_9: 
NetU15_10: 
NetU15_15: 
NetU16_3: 
NetU16_4: 
NetU16_6: 
NetU19_4: 
NetU21_1: 
NetU21_2: 
NetU103_4: 
NetU500_3: U500.3 X504.1 | length 16.5
  Top Layer w0.4: U500.3 35.195,12.595 v1(35.5,12.9) ; v1(35.55,6.3) 36.25,7 40.69,7 X504.1
  Bottom Layer w0.4: v1(35.5,12.9) 35.5,6.35 v1(35.55,6.3)
NetU500_6: U500.6 X505.1 | length 21.7
  Top Layer w0.4: U500.6 34.555,16.405 35.3,17.15 39.15,17.15 v1(39.45,16.85)
  Bottom Layer w0.4: v1(39.45,16.85) 40.1,16.2 40.1,10.25 40.75,9.6 40.75,4.33 X505.1
NetU503_4: 
NetU600_3: 
NetX11_1: 
NetX13_1: 
NetX15_1: 
NetX19_1: 
NetX23_1: 
NetX32_1: 
NetX33_1: 
OFF1: 
OFF2: 
P0_0: 
P0_1: 
P0_2: 
P0_2: 
P0_2: 
P0_2: 
P0_2: 
P0_2: 
P0_3: 
P0_3: 
P0_3: 
P0_3: 
P0_3: 
P0_3: 
P0_3: 
P0_4: 
P0_5: 
P0_6: 
P0_7: 
P0_8: 
P0_8: 
P0_8: 
P0_8: 
P0_8: 
P0_8: 
P0_8: 
P0_8: 
P0_8: 
P0_8: 
P0_8: 
P0_8: 
P0_8: 
P0_8_: 
P0_8_: 
P0_8_: 
P0_9: 
P0_9: 
P0_9: 
P0_9_: 
P0_9_: 
P0_9_: 
P0_9_: 
P0_10: 
P0_11: 
P0_13: 
P0_15: 
P0_16: 
P0_17: 
P0_18: 
P0_19: 
P0_19: 
P0_20: 
P0_21: 
P0_23: 
P0_24: 
P0_25: 
P0_25: 
P0_25: 
P0_25: 
P0_25: 
P0_25: 
P0_25: 
P0_25: 
P0_25: 
P0_25: 
P0_25: 
P0_27: 
P0_27: 
P0_27: 
P0_27: 
P0_27: 
P0_27: 
P0_27: 
P0_27: 
P0_27: 
P0_27: 
P0_27: 
P0_27: 
P0_27: 
P0_28: 
P0_29: 
P0_30: 
P1_0: 
P1_1: 
P1_4: 
P1_8: 
P1_9: 
P1_10: 
P1_14: 
P1_15: 
P1_16: 
P1_17: 
P1_18: 
P1_19: 
P1_20: 
P1_21: 
P1_21: 
P1_22: 
P1_22: 
P1_22: 
P1_22: 
P1_22: 
P1_22: 
P1_22: 
P1_22: 
P1_23: 
P1_24: 
P1_25: 
P1_25: 
P1_25: 
P1_25: 
P1_25: 
P1_25: 
P1_26: 
P1_27: 
P1_28: 
P1_29: 
P1_29: 
P1_29: 
P1_29: 
P1_29: 
P1_30: 
P1_31: 
P1_31: 
P1_31: 
P1_31: 
P1_31: 
P1_31: 
P1_31: 
P1_31: 
P1_31: 
P1_31: 
P1_31: 
P1_31: 
P1_31: 
P1_31: 
P2_0: 
P2_1: 
P2_7: 
P2_8: 
P2_9: 
P2_10: 
P2_13: 
P3_25: 
P3_26: 
PB1: 
PB1: 
PB2: 
PB2: 
PB3: 
PB3: 
PE6: 
PE6: 
PE7: 
PQ3: 
PQ4: 
PQ5: 
PQ6: 
PROG0: 
PROG1: 
PROG1: 
PROG1: 
PWM: 
PWM1: 
PWM2: 
REL1: 
REL1: 
REL2: 
REL3: 
REL4: 
REL5: 
REL6: 
RES: 
RX: 
RXCAN: 
SK1: 
SK2: 
SK3: 
SK4: 
T3: 
T3: 
TD1: 
TX: 
U2: 
U5: 
U6: 
U7: 
U8: 
UAKB: 
UB1: 
UB2: 
UBM1: 
UBM2: 
UIB1: 
UIB2: 
ULOAD: 
US: 
US1: 
US1: 
US1: 
US1: 
US1: 
US1: 
US1: 
US1: 
US1: 
UU1: 
UU2: 
UU3: 
UU4: 
UU5: 
UU6: 
UU7: 
UU8: 
UU9: 
UU10: 
UU11: 
UU12: 
UU13: 
UU14: 
VBAT: 
VREF: 
VS: 
VS: 
WD_RES: 
pads on no net: D511.4 D511.5 JP500.3 JP500.4 JP500.5 JP500.6 JP500.7 JP500.8 U500.10 U500.11 U500.14 U501.4 U501.8 U505.10 U505.11 U505.14 X507.1

## Polygon pours and split planes (outlines as drawn)
NetBT500_2 on Top Layer (hatched 90Degree grid 0.1 track 0.3, remove dead copper): 32.35,42.5 26.6,42.5 26.6,40.45 27.75,39.3 33.85,39.3 33.85,39.25
NetBT500_2 on Top Layer (hatched 90Degree grid 0.1 track 0.3, remove dead copper): 35.176,-1.05 35.176,4.35 33.526,6 33.526,7.1 32.176,8.45 32.176,42.5 77.476,42.5 77.476,-2.45 34.926,-2.45 34.926,-0.55 35.276,-0.55
NetBT500_2 on Bottom Layer (hatched 90Degree grid 0.1 track 0.3, remove dead copper): 32.95,42.25 26.6,42.25 26.6,41.15 28.3,39.45 28.45,39.3 32.3,39.3 32.3,39.35
NetBT500_2 on Bottom Layer (hatched 90Degree grid 0.1 track 0.3, remove dead copper): 34.6,42.15 26.85,42.15 26.85,40.6 27.9,39.55 33.4,39.55 33.4,39.45
NetBT500_2 on Bottom Layer (hatched 90Degree grid 0.1 track 0.3, remove dead copper): 33.65,-2.5 33.65,5.2 31.8,7.05 31.8,42.45 77.55,42.45 77.55,-2.55 33.65,-2.55
NetC500_1 on Bottom Layer (hatched 90Degree grid 0.1 track 0.3, remove dead copper): 79.492,48.9 -2.458,48.9 -2.458,113.25 79.892,113.25 79.892,49 79.642,49

## Keep-outs
Keep-Out Layer:
  lines w0.25: 0,110.45 0,0 76.5,0 76.5,110.5 ; 0,110.5 76.4,110.5

## Silkscreen, mask and mechanical layers (free items; w line width, h text height)
Bottom Overlay:
  text "+" at 33.5,10.3 h3 r180